# Altium PCB Room03.PcbDoc (part 2 of 2)
Units mil, origin at the board's own origin, x right, y up, seen from the top; angles counter-clockwise.
Board outline 3937.01 x 3543.31 mil, 2 copper layers (Top Layer, Bottom Layer); 93 components, 90 nets, 400 pads, 126 vias.
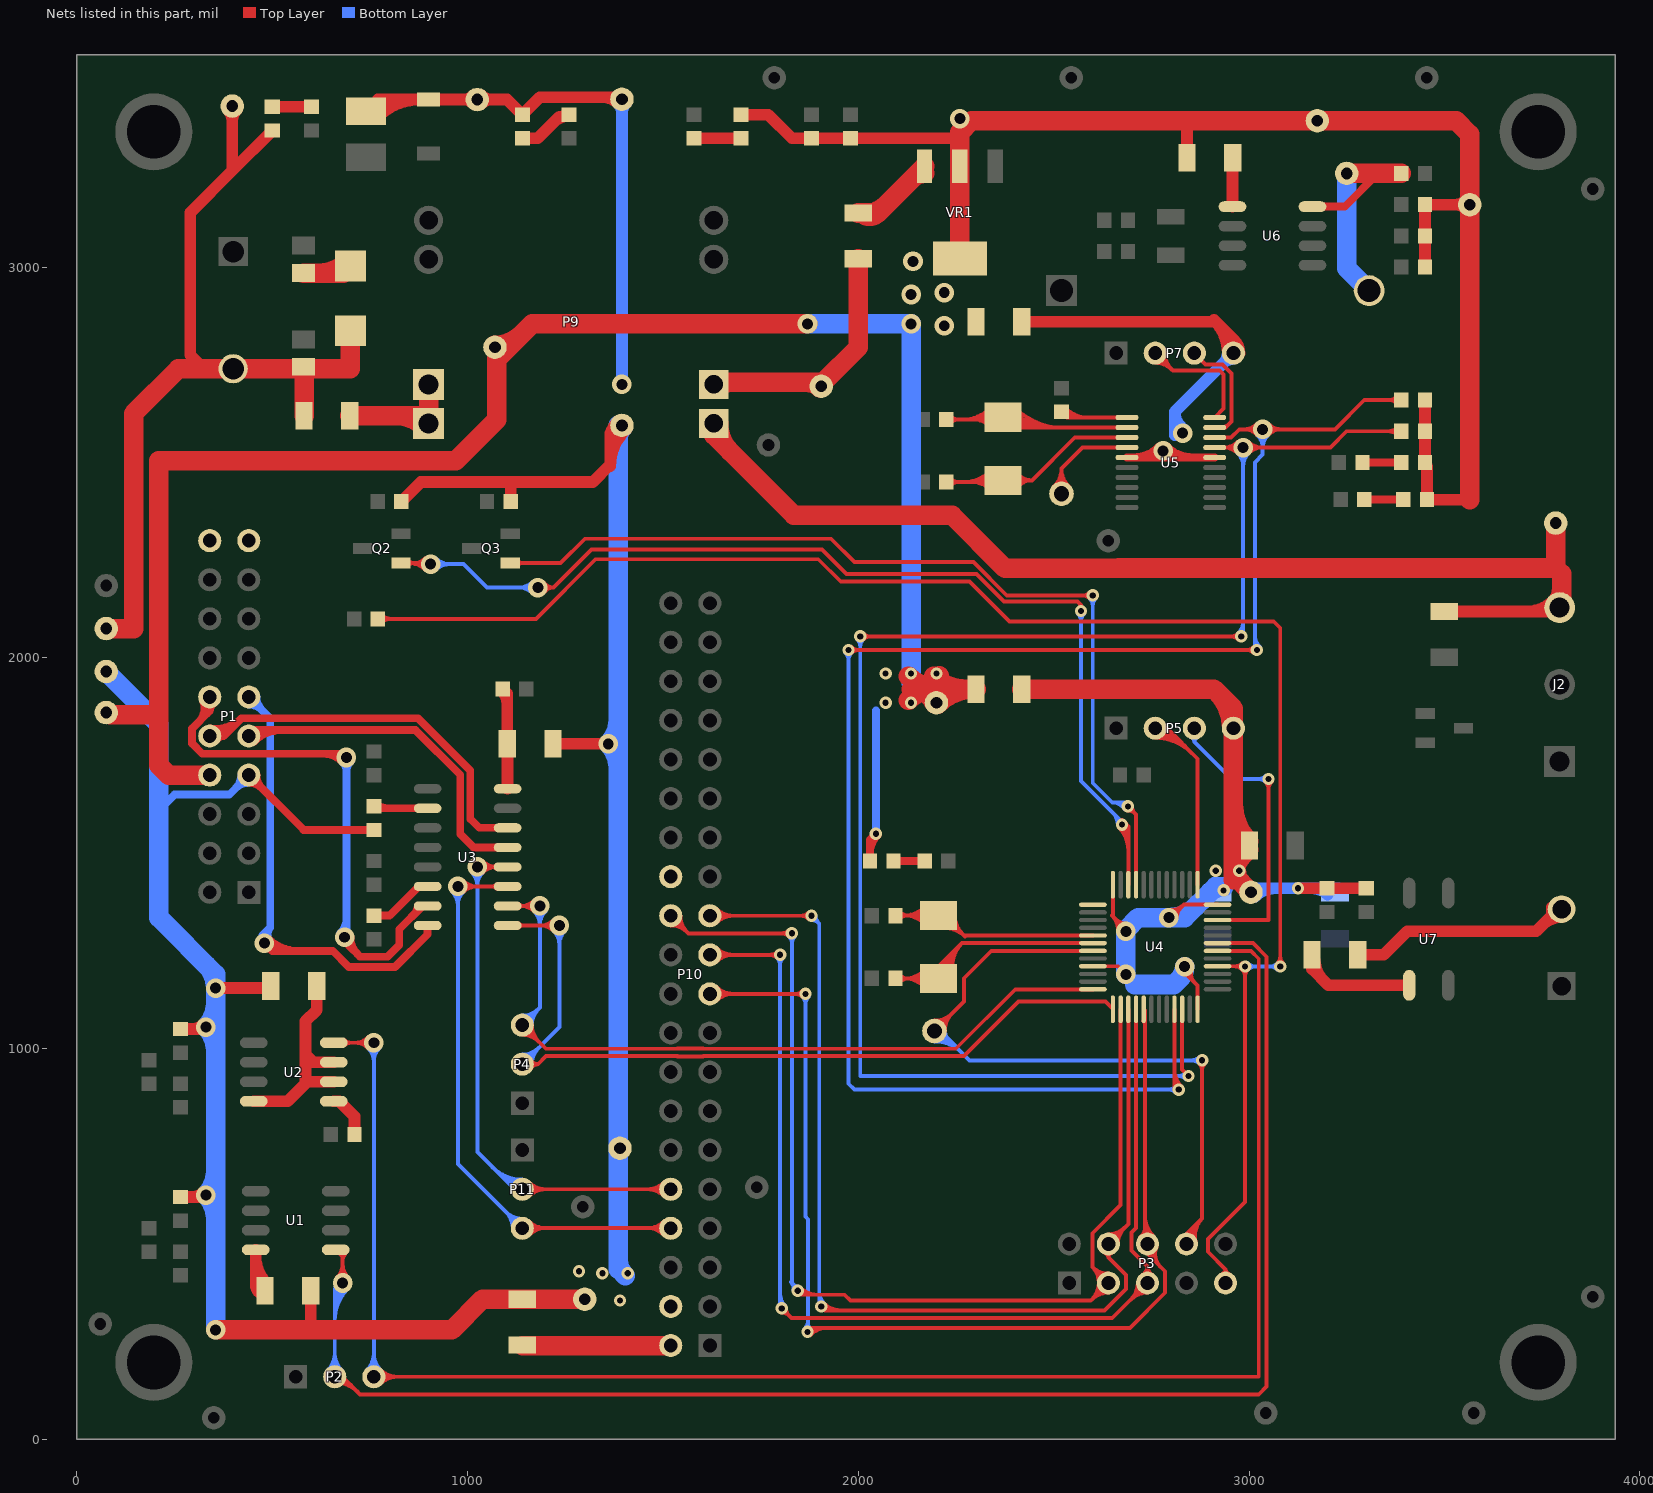
[diagram p2: the nets of this part, all layers, seen from the top]

## Via types
v1: diameter 50, hole 28, Top Layer to Bottom Layer, 76 vias
v2: diameter 31.5, hole 15.75, Top Layer to Bottom Layer, 50 vias

## Nets (pads, with @x,y where several pads share a name; then routed paths per layer and width w, separated by ;. In a path a pad name is that pad's centre, name@x,y a point inside that pad or via, vN(x,y) a via of type N, cw(c..) or ccw(c..) an arc to the next point about the centre after c; other vN are vias at no path point) (continued)
LEDST_103: P3.9 R19.2 U4.28 | length 4626.5
  Top Layer w10: R19.2@770.32,2100 1175,2100 1327.5,2252.5 1897.5,2252.5 1955,2195 2285,2195 2386.75,2093.25 3063.25,2093.25 3080,2076.5 v2(3080,1210) ; R19.2@779.72,2090.59 cw(c802.44,2067.87) 802.44,2100 cw(c802.44,2132.13) R19.2@779.72,2109.41 ; U4.28@2919.45,1210.79 2989.21,1210.79 v2(2990,1210) 2990,607.31 2895,512.31 2895,480 2940,435 ; P3.9@2931.63,423.06 ccw(c2927.29,435) 2940,435 ; P3.9@2940,400 2940,435 ; P3.9@2948.37,423.06 cw(c2952.71,435) 2940,435 ; 2962.15,1210.79 cw(c2962.15,1182.15) 2982.4,1202.4 cw(c2964.05,1184.05) 2990,1184.05 cw(c3015.95,1184.05) v2@2997.6,1202.4 ; 2965.95,1210.79 ccw(c2965.95,1234.05) v2@2982.4,1217.6 ; v2@3072.4,1217.6 ccw(c3054.05,1235.95) 3080,1235.95 ccw(c3105.95,1235.95) v2@3087.6,1217.6
  Bottom Layer w10: v2(2990,1210) v2(3080,1210) ; v2@2997.6,1202.4 cw(c3015.95,1184.05) 3015.95,1210 cw(c3015.95,1235.95) v2@2997.6,1217.6 ; v2@3072.4,1202.4 ccw(c3054.05,1184.05) 3054.05,1210 ccw(c3054.05,1235.95) v2@3072.4,1217.6
NetC1_1: C1.1 U3.2 | length 162.3
  Top Layer w20: C1.1@765.32,1615 U3.2@897.64,1615 ; C1.1@766.86,1626.19 ccw(c793.87,1653.2) 793.87,1615
NetC4_2: C4.2 R10.1 U3.16 | length 281.9
  Top Layer w30: C4.2@1087.35,1916.68 cw(c1053.57,1882.9) 1101.34,1882.9 ; C4.2@1101.34,1908.98 R10.1@1101.34,1780 1102.36,1778.98 U3.16@1102.36,1665
NetC5_2: C5.2 U3.6 | length 200.1
  Top Layer w20: C5.2@760,1340.32 800.32,1340.32 875,1415 U3.6@897.64,1415 ; C5.2@766.86,1334.44 cw(c781.04,1320.26) 781.04,1340.32 cw(c781.04,1360.37) C5.2@766.86,1346.19
NetD1_A: D1.A R11.1 | length 142.4
  Top Layer w20: R11.1@2090.31,1480 D1.A@2169.68,1480 ; R11.1@2096.19,1474.13 cw(c2110.37,1459.94) 2110.37,1480 cw(c2110.37,1500.06) R11.1@2096.19,1485.87 ; D1.A@2163.81,1474.13 ccw(c2149.63,1459.94) 2149.63,1480 ccw(c2149.63,1500.06) D1.A@2163.81,1485.87
NetD2_A: D2.A R17.1 | length 162.4
  Top Layer w20: D2.A@3295.32,2405 R17.1@3394.69,2405 ; D2.A@3301.19,2399.13 cw(c3315.37,2384.94) 3315.37,2405 cw(c3315.37,2425.06) D2.A@3301.19,2410.87 ; R17.1@3388.81,2399.13 ccw(c3374.63,2384.94) 3374.63,2405 ccw(c3374.63,2425.06) R17.1@3388.81,2410.87
NetD3_A: D3.A R18.1 | length 162.4
  Top Layer w20: D3.A@3295.32,2500 R18.1@3394.69,2500 ; D3.A@3296.19,2494.13 cw(c3310.37,2479.94) 3310.37,2500 cw(c3310.37,2520.06) D3.A@3296.19,2505.87 ; R18.1@3383.81,2494.13 ccw(c3369.63,2479.94) 3369.63,2500 ccw(c3369.63,2520.06) R18.1@3383.81,2505.87
NetD5_1: D5.1 R31.2 | length 177
  Top Layer w50: R31.2@580,2984.96 D5.1@682.28,2984.96 ; 622.54,2984.96 ccw(c622.54,3080.14) D5.1@689.84,3012.84
NetD6_A: D6.A R28.1 | length 95
  Top Layer w30: R28.1@500,3410.31 D6.A@595,3410
NetD7_A: D7.A R29.1 | length 195.7
  Top Layer w30: R29.1@1140,3329.69 1179.69,3329.69 1235,3385 ; 1221.45,3371.45 cw(c1259.02,3333.88) D7.A@1259.02,3387.01 ; 1225.65,3375.65 cw(c1253.83,3347.48) D7.A@1258.62,3387.03
NetD8_A: D8.A R30.1 | length 120
  Top Layer w30: D8.A@1580,3329.68 R30.1@1700,3329.69
NetJ1_2: J1.2 R25.1 | length 637.1
  Top Layer w30: R25.1@3278.66,1240 3345,1240 3405,1300 3735,1300 3775,1340 J1.2@3775,1361.85 ; 3751.21,1316.21 cw(c3800,1267.41) J1.2@3800,1336.42 ; 3770.88,1335.88 ccw(c3749.91,1356.85) J1.2@3779.57,1356.85
NetP9_3: P9.3 P9.4 R27.2 | length 362.2
  Top Layer w50: R27.2@698.66,2620 P9.4@880,2620 ; 817.02,2620 cw(c817.02,2517.02) P9.4@889.84,2589.84 ; P9.4@900,2600 P9.3@900,2700
NetR1_2: R1.2 U1.8 | length 212.5
  Top Layer w30: 457.64,395.47 ccw(c483.62,395.47) R1.2@465.25,377.1 ; 457.64,467.9 ccw(c556.05,467.9) R1.2@486.46,398.31 ; U1.8@457.64,485 457.64,403.7 R1.2@481.34,380
NetR2_2: R2.2 U2.2 U2.3 U2.8 | length 558
  Top Layer w30: U2.8@452.64,865 540,865 590,915 U2.2@657.36,915 ; 585,920 585,985 ; R2.2@613.66,1160 613.66,1098.66 585,1070 585,985 ; U2.3@657.36,965 605,965 585,985
NetR8_2: R8.2 U2.1 | length 115.5
  Top Layer w30: U2.1@657.36,865 671.98,865 710.32,826.67 R8.2@710.32,780
NetR16_2: R16.2 U5.1 | length 309.5
  Top Layer w10: R16.2@2516.25,2624.95 ccw(c2539.9,2648.6) 2539.9,2615.16 ; R16.2@2520,2629.68 2534.53,2615.16 U5.1@2687.8,2615.16 ; R16.2@2523.32,2632.02 ccw(c2564.04,2672.74) 2564.04,2615.16 ; R16.2@2530.39,2639.09 ccw(c2588.18,2696.88) 2588.18,2615.16
NetR25_2: R25.2 U7.1 | length 390.6
  Top Layer w20: R25.2@3154.45,1216.69 cw(c3145.58,1203.66) 3161.34,1203.66 ; R25.2@3161.34,1240 3161.34,1203.66 ; R25.2@3168.23,1216.69 ccw(c3177.1,1203.66) 3161.34,1203.66
  Top Layer w30: 3161.34,1203.66 3203.11,1161.89 U7.1@3410,1161.89 ; R25.2@3168.58,1226.81 ccw(c3241.96,1226.81) 3190.07,1174.93
NetR32_2: R32.2 VR1.3 | length 360.5
  Top Layer w50: R32.2@2000,3138.66 2050,3138.66 ; R32.2@2011.47,3136.51 ccw(c2029.53,3159.13) 2050,3138.66 ; R32.2@2013.19,3135.91 ccw(c2013.19,3218.12) 2071.32,3159.99 ; 2138.2,3226.86 cw(c2169.45,3195.61) VR1.3@2169.45,3239.8 ; VR1.3@2169.45,3258.11 2050,3138.66
NEX_CON1: Q3.1 U4.45 | length 2596.4
  Top Layer w10: Q3.1@1109.21,2242.6 1237.6,2242.6 1300,2305 1930,2305 1990,2245 2295,2245 2380,2160 v2(2600,2160) ; Q3.1@1126.25,2236.39 cw(c1141.24,2221.4) 1141.24,2242.6 cw(c1141.24,2263.79) Q3.1@1126.25,2248.81 ; v2@2592.4,2152.4 ccw(c2574.05,2134.05) 2574.05,2160 ccw(c2574.05,2185.95) v2@2592.4,2167.6 ; v2@2690,1609.25 cw(c2690,1583.3) 2708.35,1601.65 cw(c2726.7,1620) v2@2700.75,1620 ; v2(2690,1620) 2710.79,1599.21 U4.45@2710.79,1419.45
  Bottom Layer w10: v2@2592.4,2152.4 cw(c2574.05,2134.05) 2600,2134.05 cw(c2625.95,2134.05) v2@2607.6,2152.4 ; v2(2600,2160) 2600,1680 2650,1630 ; 2669.28,1630 cw(c2669.28,1605.4) v2@2689.39,1619.57 ; v2@2681.21,1613.81 ccw(c2650,1591.82) 2650,1630 ; v2(2690,1620) 2680,1630 2650,1630
NEX_CON2: Q2.1 U4.46 | length 3228.7
  Top Layer w10: Q2.1@829.21,2242.6 902.6,2242.6 v1(905.2,2240) ; Q2.1@846.25,2236.39 cw(c861.24,2221.4) 861.24,2242.6 cw(c861.24,2263.79) Q2.1@846.25,2248.81 ; Q2.1@850.64,2242.6 cw(c850.64,2185.44) v1@891.05,2225.86 ; 863.19,2242.6 ccw(c863.19,2282.01) v1@891.05,2254.14 ; 874.78,2242.6 cw(c874.78,2209.58) v1@898.13,2232.93 ; v1(1180,2180) 1220,2180 ; v1@1196,2168 cw(c1220,2150) 1220,2180 ; v1@1196,2192 ccw(c1220,2210) 1220,2180 ; 2564.74,2140.26 cw(c2551.11,2126.63) v2@2569.29,2120.25 ; v2(2570,2120) 2568,2120 2564,2124 2570,2130 2570,2135 2561,2144 2373.37,2144 2302.37,2215 1970,2215 1907.5,2277.5 1317.5,2277.5 1220,2180 ; v2@2667.19,1565.65 cw(c2609.45,1507.92) 2691.1,1507.92 ; v2@2674.26,1572.72 cw(c2633.59,1532.06) 2691.1,1532.06 ; v2(2674.79,1573.25) 2675,1573.46 2675,1585 2691.1,1568.9 U4.46@2691.1,1419.45 ; v2@2681.33,1579.79 cw(c2657.74,1556.2) 2691.1,1556.2
  Bottom Layer w10: v1(905.2,2240) 990,2240 1050,2180 v1(1180,2180) ; v1@919.34,2225.86 cw(c953.48,2191.72) 953.48,2240 cw(c953.48,2288.28) v1@919.34,2254.14 ; v1@1165.86,2165.86 ccw(c1131.72,2131.72) 1131.72,2180 ccw(c1131.72,2228.28) v1@1165.86,2194.14 ; v2@2562.4,2112.4 cw(c2544.05,2094.05) 2570,2094.05 cw(c2595.95,2094.05) v2@2577.6,2112.4 ; v2(2570,2120) 2570,1685 v2@2675,1580 ; 2651.52,1603.48 cw(c2621.29,1573.25) v2@2664.04,1573.25
NRST: P3.8 T1.1 U4.7 | length 2333.3
  Top Layer w10: T1.1@2195,1045 2270,1120 2270,1180 2340.16,1250.16 U4.7@2600.55,1250.16 ; T1.1@2195,1061.5 ccw(c2195,1101.32) 2223.16,1073.16 ccw(c2251.32,1045) T1.1@2211.5,1045 ; T1.1@2195,1071.5 ccw(c2195,1135.46) 2240.23,1090.23 ccw(c2285.46,1045) T1.1@2221.5,1045 ; P3.8@2840,500 2840,525 2880,565 ; P3.8@2844.39,501.11 cw(c2884.06,511.18) 2855.12,540.12 ; P3.8@2854.08,503.57 cw(c2903.91,516.21) 2867.56,552.56 ; P3.8@2863.77,506.03 cw(c2923.75,521.25) 2880,565 ; v2@2872.4,962.4 cw(c2854.05,944.05) 2880,944.05 cw(c2905.95,944.05) v2@2887.6,962.4 ; v2(2880,970) 2880,565
  Bottom Layer w10: T1.1@2195,1018.5 cw(c2195,918.32) 2265.84,989.16 ; T1.1@2195,1028.5 cw(c2195,952.47) 2248.77,1006.23 ; T1.1@2195,1038.5 cw(c2195,986.61) 2231.7,1023.3 ; T1.1@2195,1045 2210,1045 2285,970 v2(2880,970) ; T1.1@2221.5,1045 ccw(c2249.25,1045) 2229.62,1025.38 ; v2@2872.4,962.4 ccw(c2854.05,944.05) 2854.05,970 ccw(c2854.05,995.95) v2@2872.4,977.6
NRST_030: T2.1 U5.4 | length 417.9
  Top Layer w10: T2.1@2501.26,2438.74 ccw(c2456.03,2483.97) 2520,2483.97 ccw(c2583.97,2483.97) T2.1@2538.74,2438.74 ; T2.1@2508.34,2431.66 ccw(c2480.18,2459.82) 2520,2459.82 ccw(c2559.82,2459.82) T2.1@2531.66,2431.66 ; T2.1@2520,2420 2520,2485 2573.39,2538.39 U5.4@2687.8,2538.39
OSC32_IN: C6.2 U4.5 Y1.1 | length 977.5
  Top Layer w10: C6.2@2096.02,1340.71 Y1.1@2205,1340.71 2219.29,1340.71 2270.47,1289.53 U4.5@2600.55,1289.53 ; C6.2@2104.72,1331.57 cw(c2126.78,1309.52) 2126.78,1340.71 ; C6.2@2104.72,1350.39 ccw(c2128.11,1373.78) 2128.11,1340.71 ; Y1.1@2172.25,1317.8 ccw(c2116.93,1262.48) 2116.93,1340.71 ccw(c2116.93,1418.93) Y1.1@2172.25,1363.62 ; Y1.1@2179.32,1324.87 ccw(c2141.08,1286.63) 2141.08,1340.71 ccw(c2141.08,1394.79) Y1.1@2179.32,1356.55 ; Y1.1@2216.26,1318.35 cw(c2219.62,1265.53) 2257.04,1302.96 ; Y1.1@2216.9,1308.37 cw(c2221.48,1236.1) 2272.69,1287.31 ; Y1.1@2237.24,1340.71 ccw(c2280.59,1340.71) Y1.1@2249.94,1310.06 ; Y1.1@2247.24,1340.71 ccw(c2314.73,1340.71) 2267.01,1292.99
OSC32_OUT: C7.2 U4.6 Y1.2 | length 1162.8
  Top Layer w10: C7.2@2096.02,1179.29 Y1.2@2205,1179.29 2205,1210 2264.84,1269.84 ; C7.2@2104.72,1169.61 cw(c2128.11,1146.22) 2128.11,1179.29 ; C7.2@2104.72,1188.43 ccw(c2126.78,1210.48) 2126.78,1179.29 ; Y1.2@2172.25,1156.38 ccw(c2116.93,1101.07) 2116.93,1179.29 ccw(c2116.93,1257.52) Y1.2@2172.25,1202.2 ; Y1.2@2179.32,1163.45 ccw(c2141.08,1125.21) 2141.08,1179.29 ccw(c2141.08,1233.37) Y1.2@2179.32,1195.13 ; Y1.2@2207.62,1176.92 cw(c2251.37,1191.26) 2218.82,1223.82 ; Y1.2@2217.12,1180.04 cw(c2268.7,1196.94) 2230.32,1235.32 ; Y1.2@2226.63,1183.15 cw(c2286.03,1202.62) 2241.83,1246.83 ; Y1.2@2236.13,1186.27 cw(c2303.36,1208.3) 2253.33,1258.33 ; Y1.2@2245.63,1189.38 cw(c2320.69,1213.98) 2264.84,1269.84 ; U4.6@2600.55,1269.84 2264.84,1269.84
OSC_IN: C10.2 U5.2 Y2.1 | length 1232.8
  Top Layer w10: C10.2@2225.32,2610 Y2.1@2364.29,2610 ; C10.2@2234.72,2600.59 cw(c2257.44,2577.87) 2257.44,2610 cw(c2257.44,2642.13) C10.2@2234.72,2619.41 ; 2268.15,2610 ccw(c2268.15,2707.71) Y2.1@2337.25,2638.62 ; 2292.29,2610 ccw(c2292.29,2683.57) Y2.1@2344.32,2631.55 ; 2295.72,2610 cw(c2295.72,2551.27) Y2.1@2337.25,2592.8 ; 2316.44,2610 ccw(c2316.44,2659.43) Y2.1@2351.39,2624.48 ; 2319.86,2610 cw(c2319.86,2575.41) Y2.1@2344.32,2599.87 ; Y2.1@2370,2615.71 2396.14,2589.57 U5.2@2687.8,2589.57 ; Y2.1@2374.47,2610.34 ccw(c2424.61,2660.48) 2424.61,2589.57 ; Y2.1@2381.54,2617.41 ccw(c2448.75,2684.62) 2448.75,2589.57 ; Y2.1@2388.61,2624.48 ccw(c2472.89,2708.76) 2472.89,2589.57 ; Y2.1@2395.68,2631.55 ccw(c2497.04,2732.9) 2497.04,2589.57 ; Y2.1@2402.75,2638.62 ccw(c2521.18,2757.05) 2521.18,2589.57
OSC_OUT: C11.2 U5.3 Y2.2 | length 947.9
  Top Layer w10: C11.2@2225.32,2450 Y2.2@2365.71,2450 ; C11.2@2234.72,2440.59 cw(c2257.44,2417.87) 2257.44,2450 cw(c2257.44,2482.13) C11.2@2234.72,2459.41 ; 2271.57,2450 ccw(c2271.57,2542.88) Y2.2@2337.25,2477.2 ; 2292.29,2450 cw(c2292.29,2386.43) Y2.2@2337.25,2431.38 ; 2295.72,2450 ccw(c2295.72,2518.73) Y2.2@2344.32,2470.13 ; 2316.44,2450 cw(c2316.44,2410.57) Y2.2@2344.32,2438.45 ; 2319.86,2450 ccw(c2319.86,2494.59) Y2.2@2351.39,2463.06 ; Y2.2@2370,2454.29 2444.29,2454.29 ; Y2.2@2397.82,2440.93 cw(c2424.4,2421.18) 2424.4,2454.29 cw(c2424.4,2487.4) Y2.2@2397.82,2467.65 ; Y2.2@2405.85,2434.97 cw(c2444.29,2406.4) 2444.29,2454.29 ; Y2.2@2405.85,2473.62 ccw(c2444.29,2502.18) 2444.29,2454.29 ; U5.3@2687.8,2563.98 2553.98,2563.98 2444.29,2454.29
RASPI_RX: P1.9 U3.13 | length 998.3
  Top Layer w20: P1.9@439.67,1800.33 cw(c475.07,1764.93) 475.07,1815 ; P1.9@440,1800 455,1815 866.77,1815 981,1700.77 981,1549 1015,1515 U3.13@1102.36,1515 ; P1.9@453.81,1786.19 cw(c523.36,1716.64) 523.36,1815
RASPI_TX: P1.10 U3.14 | length 1158.8
  Top Layer w20: P1.10@339.93,1799.53 ccw(c348.68,1861.32) 392.81,1817.19 ; P1.10@340,1800 375.61,1800 ; P1.10@342.74,1819.33 ccw(c355.71,1910.96) 421.14,1845.52 ; P1.10@356.46,1789.5 cw(c375.61,1777.29) 375.61,1800 ; P1.10@356.46,1810.5 ccw(c375.61,1822.71) 375.61,1800 ; U3.14@1102.36,1565 1030,1565 1007,1588 1007,1711.54 873.01,1845.53 421.14,1845.53 375.61,1800
RU0RX: P10.10 P11.2 U3.12 | length 2016.8
  Top Layer w10: v1(1025,1465) U3.12@1102.36,1465 ; v1@1039.14,1450.86 cw(c1073.28,1416.72) 1073.28,1465 cw(c1073.28,1513.28) v1@1039.14,1479.14 ; U3.12@1073.92,1460.18 ccw(c1062.3,1448.56) 1062.3,1465 ccw(c1062.3,1481.44) U3.12@1073.92,1469.82 ; P11.2@1140,640 P10.10@1520,640 ; P11.2@1150.27,629.73 cw(c1175.07,604.93) 1175.07,640 cw(c1175.07,675.07) P11.2@1150.27,650.27 ; P11.2@1157.34,622.66 cw(c1199.21,580.79) 1199.21,640 cw(c1199.21,699.21) P11.2@1157.34,657.34 ; P10.10@1502.66,622.66 ccw(c1460.79,580.79) 1460.79,640 ccw(c1460.79,699.21) P10.10@1502.66,657.34 ; P10.10@1509.73,629.73 ccw(c1484.93,604.93) 1484.93,640 ccw(c1484.93,675.07) P10.10@1509.73,650.27
  Bottom Layer w10: v1@1010.86,1450.86 cw(c976.72,1416.72) 1025,1416.72 cw(c1073.28,1416.72) v1@1039.14,1450.86 ; 1025,775 v1(1025,1465) ; 1025,780 1025,735 1120,640 P11.2@1140,640 ; 1063.99,696.01 ccw(c1140,772.03) P11.2@1140,664.53 ; 1081.06,678.94 ccw(c1140,737.88) P11.2@1140,654.53 ; 1098.13,661.87 ccw(c1140,703.74) P11.2@1140,644.53
RU0TX: P10.8 P11.3 U3.11 | length 2068.4
  Top Layer w10: v1@985,1415 U3.11@1102.36,1415 ; v1@989.14,1400.86 cw(c1023.28,1366.72) 1023.28,1415 cw(c1023.28,1463.28) v1@989.14,1429.14 ; U3.11@1073.92,1410.18 ccw(c1062.3,1398.56) 1062.3,1415 ccw(c1062.3,1431.44) U3.11@1073.92,1419.82 ; P11.3@1140,540 1141,541 1519,541 P10.8@1520,540 ; P11.3@1150.27,529.73 cw(c1177.49,502.51) 1177.49,541 ; P11.3@1150.27,550.27 ccw(c1172.66,572.66) 1172.66,541 ; P11.3@1157.34,522.66 cw(c1201.63,478.37) 1201.63,541 ; P11.3@1157.34,557.34 ccw(c1196.8,596.8) 1196.8,541 ; 1458.37,541 cw(c1458.37,478.37) P10.8@1502.66,522.66 ; 1463.2,541 ccw(c1463.2,596.8) P10.8@1502.66,557.34 ; 1482.51,541 cw(c1482.51,502.51) P10.8@1509.73,529.73 ; 1487.34,541 ccw(c1487.34,572.66) P10.8@1509.73,550.27
  Bottom Layer w10: v1@960.86,1400.86 cw(c926.72,1366.72) 975,1366.72 cw(c1023.28,1366.72) v1@989.14,1400.86 ; v1(975,1415) 975,705 P11.3@1140,540 P11.3@1145,540 ; P11.3@1115.47,540 ccw(c1056.26,540) 1098.13,581.87 ccw(c1140,623.74) P11.3@1140,564.53 ; P11.3@1125.47,540 ccw(c1090.4,540) 1115.2,564.8 ccw(c1140,589.6) P11.3@1140,554.53
SPI1_MISO: P3.5 P10.21 U4.16 | length 3301.7
  Top Layer w10: P10.21@1620,1240 v2(1800,1240) ; P10.21@1630.27,1229.73 cw(c1655.07,1204.93) 1655.07,1240 cw(c1655.07,1275.07) P10.21@1630.27,1250.27 ; P10.21@1637.34,1222.66 cw(c1679.21,1180.79) 1679.21,1240 cw(c1679.21,1299.21) P10.21@1637.34,1257.34 ; v2@1792.4,1232.4 ccw(c1774.05,1214.05) 1774.05,1240 ccw(c1774.05,1265.95) v2@1792.4,1247.6 ; v2@1804.09,324.25 cw(c1804.09,298.3) 1822.44,316.65 cw(c1840.78,335) v2@1814.84,335 ; v2(1804.09,335) 1829.09,310 2650,310 P3.5@2740,400 2740,442.69 ; U4.16@2710.79,1100.55 2710.79,540.79 2699.47,529.47 2699.47,483.21 2740,442.69 ; P3.5@2715.47,400 cw(c2656.26,400) 2698.13,358.13 cw(c2740,316.26) P3.5@2740,375.47 ; P3.5@2725.47,400 cw(c2690.4,400) 2715.2,375.2 cw(c2740,350.4) P3.5@2740,385.47 ; P3.5@2727.65,421.19 ccw(c2715.12,442.68) 2740,442.68 ; P3.5@2752.35,421.19 cw(c2764.88,442.68) 2740,442.68
  Bottom Layer w10: v2@1792.4,1232.4 cw(c1774.05,1214.05) 1800,1214.05 cw(c1825.95,1214.05) v2@1807.6,1232.4 ; v2@1796.49,342.6 ccw(c1788.01,351.08) 1800,351.08 ; v2@1800,335 v2(1800,1240) ; 1800,370.82 ccw(c1839.91,370.82) v2@1811.69,342.6
SPI1_MOSI: P3.6 P10.19 U4.17 | length 3415.8
  Top Layer w10: P10.19@1620,1140 v2@1855,1140 ; P10.19@1630.27,1129.73 cw(c1655.07,1104.93) 1655.07,1140 cw(c1655.07,1175.07) P10.19@1630.27,1150.27 ; P10.19@1637.34,1122.66 cw(c1679.21,1080.79) 1679.21,1140 cw(c1679.21,1199.21) P10.19@1637.34,1157.34 ; v2@1857.4,1132.4 ccw(c1839.05,1114.05) 1839.05,1140 ccw(c1839.05,1165.95) v2@1857.4,1147.6 ; v2@1870,285 2695,285 2785,375 2785,430 2740,475 P3.6@2740,500 2733.65,506.35 U4.17@2733.65,1097.38 ; v2@1870.53,274.47 cw(c1895.95,249.05) 1895.95,285 ; v2@1877.6,267.4 cw(c1920.09,224.91) 1920.09,285 ; P3.6@2722.66,517.34 ccw(c2696.13,543.87) 2733.65,543.87 ; U4.17@2730.11,1070.27 cw(c2721.58,1061.73) 2733.65,1061.73 ; 2733.65,550.41 ccw(c2790.41,550.41) P3.6@2750.27,510.27 ; 2733.65,574.56 ccw(c2814.56,574.56) P3.6@2757.34,517.34 ; P3.6@2744.19,498.3 ccw(c2773.67,486.32) 2751.17,463.83 ; P3.6@2753.46,494.53 ccw(c2788.84,480.16) 2761.84,453.16 ; P3.6@2762.72,490.77 ccw(c2804,474) 2772.5,442.5
  Bottom Layer w10: v2@1857.4,1132.4 cw(c1839.05,1114.05) 1865,1114.05 cw(c1890.95,1114.05) v2@1872.6,1132.4 ; v2@1862.4,282.6 ccw(c1839.83,305.17) 1871.75,305.17 ; v2(1865,1140) 1865,570 1871.75,563.25 v2@1871.75,285 ; 1871.75,296.73 ccw(c1891.73,296.73) v2@1877.6,282.6
  other v2: 1870,275
SPI1_NSS: P3.3 P10.24 U4.14 | length 3494.1
  Top Layer w10: P10.24@1520,1315.47 cw(c1520,1256.26) 1561.87,1298.13 cw(c1603.74,1340) P10.24@1544.53,1340 ; P10.24@1520,1325.47 cw(c1520,1290.4) 1544.8,1315.2 cw(c1569.6,1340) P10.24@1534.53,1340 ; P10.24@1520,1340 1565,1295 v2(1830,1295) v2@1835,1295 ; v2@1822.4,1287.4 ccw(c1804.05,1269.05) 1804.05,1295 ccw(c1804.05,1320.95) v2@1822.4,1302.6 ; v2(1845,380) 1850,380 1855,375 1855,370 1965,370 1980,355 2595,355 P3.3@2640,400 2599.47,440.53 ; v2@1845.53,380.53 ccw(c1870.95,405.95) 1870.95,370 ; v2@1852.6,387.6 ccw(c1895.09,430.09) 1895.09,370 ; P3.3@2615.47,400 cw(c2556.26,400) 2598.13,358.13 cw(c2640,316.26) P3.3@2640,375.47 ; P3.3@2615.48,400.57 ccw(c2560.8,401.85) 2599.47,440.53 ; P3.3@2625.47,400 cw(c2590.4,400) 2615.2,375.2 cw(c2640,350.4) P3.3@2640,385.47 ; P3.3@2625.48,400.34 ccw(c2593.09,401.1) 2616,424 ccw(c2638.9,446.91) P3.3@2639.66,414.52 ; P3.3@2639.43,424.52 cw(c2638.15,479.2) 2599.47,440.53 ; U4.14@2671.42,1100.55 2671.42,599.26 2599.47,527.31 2599.47,440.53
  Bottom Layer w10: v2@1822.4,1287.4 cw(c1804.05,1269.05) 1830,1269.05 cw(c1855.95,1269.05) v2@1837.6,1287.4 ; 1827.5,402.5 cw(c1810.25,385.25) v2@1834.37,381.61 ; v2(1830,1295) 1830,400 1855,375 1835,395 ; 1835.19,394.81 ccw(c1845,404.62) v2@1845,390.75
SPI1_SCK: P3.4 P10.23 U4.15 | length 3353.6
  Top Layer w10: P10.23@1620,1340 v2(1880,1340) ; P10.23@1630.27,1329.73 cw(c1655.07,1304.93) 1655.07,1340 cw(c1655.07,1375.07) P10.23@1630.27,1350.27 ; P10.23@1637.34,1322.66 cw(c1679.21,1280.79) 1679.21,1340 cw(c1679.21,1399.21) P10.23@1637.34,1357.34 ; v2@1872.4,1332.4 ccw(c1854.05,1314.05) 1854.05,1340 ccw(c1854.05,1365.95) v2@1872.4,1347.6 ; v2(1905,340) 1915,330 2630,330 2685,385 2685,420 2640,465 ; v2@1905.53,340.53 ccw(c1930.95,365.95) 1930.95,330 ; v2@1912.6,347.6 ccw(c1955.09,390.09) 1955.09,330 ; P3.4@2631.63,476.94 cw(c2627.29,465) 2640,465 ; P3.4@2640,514.53 ccw(c2640,549.6) 2664.8,524.8 ccw(c2689.6,500) P3.4@2654.53,500 ; P3.4@2640,524.53 ccw(c2640,583.74) 2681.87,541.87 ccw(c2723.74,500) P3.4@2664.53,500 ; P3.4@2648.37,476.94 ccw(c2652.71,465) 2640,465 ; U4.15@2691.1,1100.55 2691.1,551.1 P3.4@2640,500 2640,465
  Bottom Layer w10: v2@1880,1329.25 cw(c1880,1303.3) 1898.35,1321.65 cw(c1916.7,1340) v2@1890.75,1340 ; v2(1880,1340) 1900,1320 v2@1900,335 ; 1900,378.02 ccw(c1943.02,378.02) v2@1912.6,347.6
SPI2_NSS: P10.26
ST407_RX: P1.11 U3.8 | length 1400.5
  Top Layer w20: v1@476.46,1266.46 ccw(c516.21,1306.21) 516.21,1250 ; v1(480,1270) 500,1250 655,1250 696,1209 814,1209 897.64,1292.64 U3.8@897.64,1315 ; v1@490.61,1280.61 ccw(c564.5,1354.5) 564.5,1250
  Bottom Layer w20: P1.11@440,1880.47 cw(c440,1833.33) 473.34,1866.66 cw(c506.67,1900) P1.11@459.53,1900 ; P1.11@440,1900 495,1845 495,1310 ; v1(480,1270) 475,1270 475,1290 495,1310 ; v1@492.28,1278.62 cw(c512.31,1292.69) 495,1310
ST407_TX: P1.12 U3.7 | length 1680.5
  Top Layer w20: 312.28,1836.67 ccw(c277.5,1871.45) P1.12@322.24,1891.88 ; P1.12@329.5,1883.54 cw(c317.29,1864.39) 340,1864.39 ; 332.65,1857.03 ccw(c305.46,1884.22) P1.12@340.43,1900.2 ; P1.12@340,1900 340,1864.39 ; P1.12@350.5,1883.54 ccw(c362.71,1864.39) 340,1864.39 ; 630.92,1754.47 cw(c630.92,1685.92) v1@679.39,1734.39 ; v1@695,1265 725,1235 795,1235 825,1265 825,1305.31 884.69,1365 U3.7@897.64,1365 ; v1@695,1735 675.53,1754.47 321.14,1754.47 294.47,1781.14 294.47,1818.86 340,1864.39 ; v1@700,1285 ccw(c760.36,1285) 717.68,1242.32 ; 863.38,1343.69 ccw(c842.07,1365) U3.7@872.2,1365
  Bottom Layer w20: v1@674.39,1295.61 ccw(c636.72,1333.28) 690,1333.28 ; v1@679.39,1734.39 cw(c653.79,1708.79) 690,1708.79 cw(c726.21,1708.79) v1@700.61,1734.39 ; v1@690,1290 v1(690,1745)
  other v1: 685,1285
SWCLK_030: P7.2 U5.20 | length 465.2
  Top Layer w10: P7.2@2760,2755.47 cw(c2760,2696.26) 2801.87,2738.13 cw(c2843.74,2780) P7.2@2784.53,2780 ; P7.2@2760,2765.47 cw(c2760,2730.4) 2784.8,2755.2 cw(c2809.6,2780) P7.2@2774.53,2780 ; P7.2@2760,2780 2805,2735 2925.06,2735 2935,2725.06 2935,2637.95 U5.20@2912.2,2615.16
SWCLK_103: P5.2 U4.37 | length 762.8
  Top Layer w10: P5.2@2760,1795.47 cw(c2760,1663.83) 2853.08,1756.92 ; P5.2@2760,1805.47 cw(c2760,1697.97) 2836.01,1773.99 ; P5.2@2760,1815.47 cw(c2760,1732.12) 2818.94,1791.06 ; P5.2@2760,1820 2790,1820 2868.27,1741.73 U4.37@2868.27,1419.45 ; P5.2@2760,1825.47 cw(c2760,1766.26) 2801.87,1808.13
SWDIO_030: P7.3 U5.19 | length 301.1
  Top Layer w10: P7.3@2860,2780 2889,2751 2931.69,2751 2955,2727.69 2955,2605 2939.57,2589.57 U5.19@2912.2,2589.57 ; U5.19@2934.84,2591.46 ccw(c2934.84,2607.42) 2946.13,2596.13
SWDIO_103: P5.3 U4.34 | length 868.6
  Top Layer w10: U4.34@2919.45,1328.9 3050,1328.9 v2(3050,1690) ; v2@3042.4,1682.4 cw(c3024.05,1664.05) 3050,1664.05 cw(c3075.95,1664.05) v2@3057.6,1682.4
  Bottom Layer w10: P5.3@2851.63,1796.94 cw(c2847.29,1785) 2860,1785 ; P5.3@2860,1820 2860,1785 ; P5.3@2868.37,1796.94 ccw(c2872.71,1785) 2860,1785 ; v2@3042.4,1682.4 ccw(c3024.05,1664.05) 3024.05,1690 ccw(c3024.05,1715.95) v2@3042.4,1697.6 ; v2(3050,1690) 2955,1690 2860,1785
U1RX: P2.2 U1.1 U4.31 | length 4619.3
  Top Layer w10: P2.2@660,160 680,160 725,115 3025,115 3045,135 3045,1235 3010.16,1269.84 U4.31@2919.45,1269.84 ; P2.2@660.05,155.47 cw(c660.68,97.92) 701.38,138.62 ; P2.2@660.16,145.47 cw(c661.05,64.67) 718.19,121.81 ; U1.1@662.36,485 680,467.36 v1(680,400) ; v1@665.86,414.14 ccw(c631.72,448.28) 680,448.28 ccw(c728.28,448.28) v1@694.14,414.14 ; 680,454.11 cw(c714.91,454.11) U1.1@690.22,478.79 ; 680,466.91 cw(c690.4,466.91) U1.1@686.94,476.72
  Bottom Layer w10: P2.2@642.66,177.34 ccw(c600.79,219.21) 660,219.21 ccw(c719.21,219.21) P2.2@677.34,177.34 ; P2.2@649.73,170.27 ccw(c624.93,195.07) 660,195.07 ccw(c695.07,195.07) P2.2@670.27,170.27 ; P2.2@660,160 660,380 v1(680,400) ccw(c728.28,351.72) 660,351.72 ; 660,303.43 cw(c776.57,303.43) v1@694.14,385.86 ; 660,327.57 cw(c752.43,327.57) v1@687.07,392.93 ; 660,375.86 cw(c704.14,375.86) v1@672.93,407.07
U1TX: P2.3 U2.4 U4.30 | length 4887.7
  Top Layer w10: U2.4@657.36,1015 v1(760,1015) ; U2.4@685.22,1008.79 cw(c700.21,993.8) 700.21,1015 cw(c700.21,1036.2) U2.4@685.22,1021.21 ; v1@745.86,1000.86 ccw(c711.72,966.72) 711.72,1015 ccw(c711.72,1063.28) v1@745.86,1029.14 ; P2.3@760,160 3025,160 3025,1230 3004.84,1250.16 U4.30@2919.45,1250.16 ; P2.3@770.27,149.73 cw(c795.07,124.93) 795.07,160 cw(c795.07,195.07) P2.3@770.27,170.27 ; P2.3@777.34,142.66 cw(c819.21,100.79) 819.21,160 cw(c819.21,219.21) P2.3@777.34,177.34
  Bottom Layer w10: P2.3@742.66,177.34 ccw(c700.79,219.21) 760,219.21 ccw(c819.21,219.21) P2.3@777.34,177.34 ; v1@745.86,1000.86 cw(c711.72,966.72) 760,966.72 cw(c808.28,966.72) v1@774.14,1000.86 ; P2.3@749.73,170.27 ccw(c724.93,195.07) 760,195.07 ccw(c795.07,195.07) P2.3@770.27,170.27 ; P2.3@760,160 v1(760,1015)
U2RX: P4.2 U3.9 U4.13 | length 2498.9
  Top Layer w10: U3.9@1102.36,1315 v1(1235,1315) ; U3.9@1130.8,1310.18 cw(c1142.43,1298.56) 1142.43,1315 cw(c1142.43,1331.44) U3.9@1130.8,1319.82 ; P4.2@1140,960 1180,960 ; P4.2@1161.86,948.88 cw(c1180,939.65) 1180,960 ; P4.2@1161.86,971.12 ccw(c1180,980.35) 1180,960 ; v1@1220.86,1300.86 ccw(c1186.72,1266.72) 1186.72,1315 ccw(c1186.72,1363.28) v1@1220.86,1329.14 ; U4.13@2651.73,1100.55 2632.28,1120 2410,1120 2270.53,980.53 1603.21,980.53 1602.69,980 1537.31,980 1536.79,980.53 1200.53,980.53 1180,960
  Bottom Layer w10: P4.2@1140,960 1235,1055 v1(1235,1315) ; P4.2@1140,974.53 ccw(c1140,1009.6) 1164.8,984.8 ccw(c1189.6,960) P4.2@1154.53,960 ; P4.2@1140,984.53 ccw(c1140,1043.74) 1181.87,1001.87 ccw(c1223.74,960) P4.2@1164.53,960 ; v1@1220.86,1300.86 cw(c1186.72,1266.72) 1235,1266.72 cw(c1283.28,1266.72) v1@1249.14,1300.86
  Bottom Layer w20: P4.2@1140,960 P4.2@1145,960 ; v1@1225,1315 v1(1235,1315)
U2TX: P4.3 U3.10 U4.12 | length 2429.1
  Top Layer w10: U3.10@1102.36,1365 v1(1185,1365) ; U3.10@1130.8,1360.18 cw(c1142.43,1348.56) 1142.43,1365 cw(c1142.43,1381.44) U3.10@1130.8,1369.82 ; P4.3@1140,1035.47 cw(c1140,976.26) 1181.87,1018.13 cw(c1223.74,1060) P4.3@1164.53,1060 ; P4.3@1140,1045.47 cw(c1140,1010.4) 1164.8,1035.2 cw(c1189.6,1060) P4.3@1154.53,1060 ; P4.3@1140,1060 1200.53,999.47 1536.79,999.47 1537.31,1000 1602.69,1000 1603.21,999.47 2249.47,999.47 2401.73,1151.73 U4.12@2600.55,1151.73 ; v1@1170.86,1350.86 ccw(c1136.72,1316.72) 1136.72,1365 ccw(c1136.72,1413.28) v1@1170.86,1379.14
  Bottom Layer w10: P4.3@1140,1060 1185,1105 v1(1185,1365) ; P4.3@1140,1074.53 ccw(c1140,1109.6) 1164.8,1084.8 ccw(c1189.6,1060) P4.3@1154.53,1060 ; P4.3@1140,1084.53 ccw(c1140,1143.74) 1181.87,1101.87 ccw(c1223.74,1060) P4.3@1164.53,1060 ; v1@1170.86,1350.86 cw(c1136.72,1316.72) 1185,1316.72 cw(c1233.28,1316.72) v1@1199.14,1350.86
U3RX: R12.1 U4.22 U5.17 | length 4582.2
  Top Layer w10: v2(2005,2055) v2(2980,2055) ; v2@2012.6,2047.4 cw(c2030.95,2029.05) 2030.95,2055 cw(c2030.95,2080.95) v2@2012.6,2062.6 ; U4.22@2828.9,1100.55 2828.9,946.1 v2(2845,930) ; U5.17@2912.2,2538.39 v1(2985,2538.39) 3208.39,2538.39 3250,2580 R12.1@3389.69,2580 ; v1@2970.86,2524.24 ccw(c2936.72,2490.1) 2936.72,2538.39 ccw(c2936.72,2586.67) v1@2970.86,2552.53 ; v2@2972.4,2047.4 ccw(c2954.05,2029.05) 2954.05,2055 ccw(c2954.05,2080.95) v2@2972.4,2062.6 ; v1@2999.14,2524.24 cw(c3033.28,2490.1) 3033.28,2538.39 cw(c3033.28,2586.67) v1@2999.14,2552.53 ; R12.1@3380.28,2570.59 ccw(c3357.56,2547.87) 3357.56,2580 ccw(c3357.56,2612.13) R12.1@3380.28,2589.41
  Bottom Layer w10: v2@1997.4,2047.4 cw(c1979.05,2029.05) 2005,2029.05 cw(c2030.95,2029.05) v2@2012.6,2047.4 ; v2(2005,2055) 2005,930 v2(2845,930) ; v2@2837.4,922.4 ccw(c2819.05,904.05) 2819.05,930 ccw(c2819.05,955.95) v2@2837.4,937.6 ; v1@2970.86,2524.24 cw(c2936.72,2490.1) 2985,2490.1 cw(c3033.28,2490.1) v1@2999.14,2524.24 ; v2@2972.4,2062.6 ccw(c2941.98,2093.02) 2985,2093.02 ; v2@2980,2045 2985,2050 v1(2985,2538.39)
U3TX: R36.1 U4.21 U5.18 | length 4870.3
  Top Layer w10: v2(1975,2020) v2(3020,2020) ; v2@1982.6,2012.4 cw(c2000.95,1994.05) 2000.95,2020 cw(c2000.95,2045.95) v2@1982.6,2027.6 ; v2@2809.21,895 U4.21@2809.21,1100.55 ; 2809.21,922.85 ccw(c2847.85,922.85) v2@2820.53,895.53 ; 2809.21,946.99 ccw(c2871.99,946.99) v2@2827.6,902.6 ; U5.18@2912.2,2563.98 2953.98,2563.98 2975,2585 v1(3035,2585) 3220,2585 3295,2660 R36.1@3389.69,2660 ; v2@3012.4,2012.4 ccw(c2994.05,1994.05) 2994.05,2020 ccw(c2994.05,2045.95) v2@3012.4,2027.6 ; v1@3020.86,2570.86 ccw(c2986.72,2536.72) 2986.72,2585 ccw(c2986.72,2633.28) v1@3020.86,2599.14 ; v1@3049.14,2570.86 cw(c3083.28,2536.72) 3083.28,2585 cw(c3083.28,2633.28) v1@3049.14,2599.14 ; R36.1@3380.28,2650.59 ccw(c3357.56,2627.87) 3357.56,2660 ccw(c3357.56,2692.13) R36.1@3380.28,2669.41
  Bottom Layer w10: v2@1967.4,2012.4 cw(c1949.05,1994.05) 1975,1994.05 cw(c2000.95,1994.05) v2@1982.6,2012.4 ; v2(1975,2020) 1975,910 1990,895 v2(2820,895) ; v2@2812.4,887.4 ccw(c2794.05,869.05) 2794.05,895 ccw(c2794.05,920.95) v2@2812.4,902.6 ; 3015,2058.02 ccw(c3058.02,2058.02) v2@3027.6,2027.6 ; v2(3020,2020) 3010,2020 3015,2025 3015,2500 3035,2520 v1(3035,2585) v1@3034,2584 ; v1@3020.86,2570.86 cw(c2986.72,2536.72) 3035,2536.72 cw(c3083.28,2536.72) v1@3049.14,2570.86
V3.3: C17.2 C18.2 P1.8 pad.1@2200,1885 pad.4@1070,2795 pad.5@3565,3160 pad.6@3175,3375 pad.13 R11.2 R12.2 R13.1 R14.1 R17.2 R18.2 R20.1 R21.1 R22.1 R23.1 R30.2 R36.2 VR1.2 | length 9393.7
  Top Layer w20: R11.2@2023.81,1486.86 ccw(c2009.63,1501.04) 2029.68,1501.04 ccw(c2049.74,1501.04) R11.2@2035.56,1486.86 ; R11.2@2029.68,1480 2029.68,1534.68 v2(2045,1550) ; R11.2@2029.68,1499.15 cw(c2095.85,1499.15) v2@2049.06,1545.94
  Top Layer w30: R30.2@1700,3390.32 1769.68,3390.32 1830.32,3329.69 C18.2@1880,3329.69 C17.2@1980,3329.69 2244.68,3329.69 ; R20.1@2841.34,3280 2841.34,3366.34 ; R18.2@3447.98,2496.68 cw(c3430.26,2478.96) 3455.32,2478.96 ; R18.2@3450.32,2500 R12.2@3450.32,2580 R36.2@3450.32,2660 ; R21.1@3450.31,3000 R23.1@3450.31,3080 R22.1@3450.31,3160 pad.5@3565,3160 ; R18.2@3455.32,2490 R17.2@3455.32,2405 3565,2405 ; pad.5@3554.39,3149.39 ccw(c3528.79,3123.79) 3528.79,3160 ccw(c3528.79,3196.21) pad.5@3554.39,3170.61
  Top Layer w50: pad.13@75,1865 85,1855 210,1855 210,1725 235,1700 P1.8@340,1700 ; 210,1865 210,2505 970,2505 1075,2610 1075,2765 1165,2855 v1(1870,2855) ; pad.4@1070,2800 ccw(c1070,2896.57) 1138.28,2828.28 ; v2@2128.46,1891.54 cw(c2197.16,1822.84) 2197.16,1920 ; v2@2128.46,1953.46 ccw(c2209.23,2034.23) 2209.23,1920 ; 2168.18,1916.82 cw(c2175.86,1909.14) 2175.86,1920 ; v2@2193.46,1953.46 ccw(c2274.23,2034.23) 2274.23,1920 ; pad.1@2195.54,1882.75 ccw(c2135,1852.19) 2135,1920 ; pad.1@2203.54,1881.46 cw(c2296.57,1788.43) R13.1@2296.57,1920 ; v2@2207.15,1954.13 cw(c2135,2013.32) 2135,1920 ; VR1.2@2247.05,3034.83 ccw(c2215.8,3066.09) 2260,3066.09 ccw(c2304.2,3066.09) VR1.2@2272.95,3034.83 ; VR1.2@2260,3021.89 VR1.2@2260,3258.11 2260,3345 2290,3375 pad.6@3175,3375 3530,3375 3565,3340 pad.5@3565,3160 3565,2405 ; R13.1@2301.34,1920 2135,1920
  Bottom Layer w20: v2(2045,1550) 2045,1865
  Bottom Layer w50: v1(1870,2855) v1(2135,2855) v2(2135,1960) 2135,1935
  other v1: 2220,2850 2135,2930 2220,2935 2140,3015 2260,3380
  other v2: 2070,1885 2135,1885 2070,1960 2200,1960
V5: C1.2 C15.1 D4.2 J2.3 P1.7 P9.5 P9.6 pad.1@1025,3428.9 pad.2@1395,3430 pad.3@3785,2345 pad.5@1905,2695 pad.8 pad.10 pad.16 pad.17 R1.1 R2.1 R3.2 R4.2 R10.2 R26.2 R29.2 R32.1 R33.2 R34.2 R35.2 | length 13266.2
  Top Layer w20: P1.7@440,1680.47 cw(c440,1633.33) 473.34,1666.66 cw(c506.67,1700) P1.7@459.53,1700 ; P1.7@440,1700 580.32,1559.68 C1.2@760,1559.68 ; C1.2@753.14,1553.81 ccw(c738.96,1539.63) 738.96,1559.68 ccw(c738.96,1579.74) C1.2@753.14,1565.56
  Top Layer w30: R3.2@265,620.32 v1@325.32,620.32 ; R4.2@265,1050.32 v1@325.32,1050.32 ; 294.55,620.32 ccw(c294.55,660.45) v1@322.93,632.07 ; 294.55,1050.32 ccw(c294.55,1090.45) v1@322.93,1062.07 ; v1(355,1155) R2.1@491.34,1155 ; 466.78,1155 ccw(c466.78,1189.56) R2.1@491.22,1165.12 ; 598.66,281.34 R1.1@598.66,380 ; C15.1@748.98,3405.82 cw(c804.7,3350.11) 804.7,3428.9 ; C15.1@769.84,3428.9 D4.2@900,3428.9 pad.1@1025,3428.9 1101.42,3428.9 R29.2@1140,3390.32 1184.68,3435 pad.2@1390,3435 ; C15.1@770.2,3384.61 cw(c877.12,3277.68) D4.2@877.12,3428.9 ; R34.2@830.32,2400 880.32,2450 1320,2450 1365,2495 1365,2575 ; pad.1@1014.39,3418.29 ccw(c988.79,3392.68) 988.79,3428.9 ccw(c988.79,3465.11) pad.1@1014.39,3439.5 ; pad.1@1035.61,3418.29 cw(c1061.21,3392.68) 1061.21,3428.9 cw(c1061.21,3465.11) pad.1@1035.61,3439.5 ; R35.2@1110.32,2400 1110.32,2445.32 ; R10.2@1218.66,1780 v1(1360,1780) ; 1346.72,3435 cw(c1346.72,3381.72) pad.2@1384.39,3419.39 ; 1365,2490.6 cw(c1493.6,2490.6) pad.17@1405.3,2584.09 ; 1365,2560.2 cw(c1427.87,2560.2) pad.17@1384.7,2605.91 ; R26.2@3500,2118.66 3784.96,2118.66 J2.3@3800,2133.7 ; 3711.93,2118.66 ccw(c3711.93,2211.77) J2.3@3777.77,2145.93
  Top Layer w50: v1(355,280) 960,280 1038.66,358.66 R33.2@1140,358.66 pad.16@1300,358.66 ; P9.5@1630,2600 1630,2570 1835,2365 2240,2365 2376,2229 2665.27,2229 2666.27,2230 3785,2230 ; P9.6@1635,2705 1910,2705 2000,2795 R32.1@2000,3021.34 ; P9.6@1638.77,2691.23 cw(c1672.01,2657.99) 1672.01,2705 ; P9.5@1642.4,2600 ccw(c1744.77,2600) 1672.38,2527.62 ; 1868.79,2705 cw(c1868.79,2658.79) pad.5@1901.46,2691.46 ; J2.3@3784.84,2138.86 ccw(c3748.24,2175.46) 3800,2175.46 ; pad.3@3785,2345 3785,2230 ; J2.3@3800,2133.7 3800,2215 3785,2230
  Bottom Layer w20: 210,1630 230,1630 250,1650 390,1650 P1.7@440,1700 ; P1.7@420.47,1700 cw(c373.33,1700) 406.66,1666.66 cw(c440,1633.33) P1.7@440,1680.47
  Bottom Layer w30: pad.2@1384.39,3419.39 cw(c1358.79,3393.79) 1395,3393.79 cw(c1431.21,3393.79) pad.2@1405.61,3419.39 ; v1(1395,2700) pad.2@1395,3420
  Bottom Layer w50: pad.10@75,1965 210,1830 210,1630 210,1335 355,1190 v1(355,1155) ; 330.25,1214.75 cw(c270.5,1155) v1(355,1155) ; v1(355,280) v1(355,1155) ; 355,564.64 ccw(c269.64,564.64) v1(330,625) ccw(c269.64,685.36) 355,685.36 ; 355,994.64 ccw(c269.64,994.64) v1(330,1055) ccw(c269.64,1115.36) 355,1115.36 ; 1385,435 pad.17@1385,2595 ; 1385,463.02 ccw(c1448.02,463.02) v2@1403.46,418.46 ; 1385,1719.64 ccw(c1299.64,1719.64) v1(1360,1780) ccw(c1299.64,1840.36) 1385,1840.36 ; 1385,2558.79 cw(c1431.21,2558.79) pad.17@1398.54,2591.46
  other v2: 1390,355 1345,425 1410,425 1285,430
V12: C16.2 D5.2 J3.2 P1.19 P1.20 pad.0@397.66,3412.34 pad.12 R27.1 R28.2 | length 2371.6
  Top Layer w30: 325,2740 290,2775 290,3139.68 397.66,3247.34 ; pad.0@387.05,3401.74 cw(c361.44,3376.13) 397.66,3376.13 cw(c433.87,3376.13) pad.0@408.26,3401.74 ; pad.0@397.66,3412.34 397.66,3247.34 ; J3.2@400,2735 J3.2@415,2735 ; R28.2@500,3349.68 397.66,3247.34
  Top Layer w50: pad.12@75,2075 145,2075 145,2625 260,2740 325,2740 J3.2@400,2740 700,2740 D5.2@700,2837.32 ; R27.1@581.34,2620 C16.2@581.34,2723.62
V_BAT: U4.1
VBAT: C19.2 pad.2@3250,3240 U6.8 U8.2 | length 666.3
  Top Layer w20: U6.8@3162.36,3155 3245,3155 3330,3240
  Top Layer w50: pad.2@3250,3240 3330,3240 C19.2@3389.69,3240
  Bottom Layer w50: pad.2@3250,3240 3250,2997.4 U8.2@3307.4,2940
VCC_030: P7.4 R14.2 U5.5 U5.16 | length 1606
  Top Layer w20: U5.5@2687.8,2512.8 2688.2,2513.2 U5.16@2912.2,2513.2 ; U5.5@2703.24,2513.2 ccw(c2703.24,2606.76) v1@2769.39,2540.61 ; 2751.52,2513.2 ccw(c2751.52,2558.48) v1@2783.54,2526.46 ; v1@2776.46,2526.46 ccw(c2808.48,2558.48) 2808.48,2513.2 ; v1@2790.61,2540.61 ccw(c2856.76,2606.76) 2856.76,2513.2
  Top Layer w30: R14.2@2418.66,2860 2915,2860 2960,2815 ; 2910.45,2864.55 cw(c2825.9,2780) P7.4@2945.47,2780 ; P7.4@2949.74,2790.29 ccw(c2925.11,2815) 2960,2815 ; P7.4@2960,2780 2960,2815 ; 2961.66,2813.34 cw(c2928.33,2780) P7.4@2975.47,2780 ; P7.4@2970.26,2790.29 cw(c2994.89,2815) 2960,2815
  Bottom Layer w30: v1@2810,2570 2810,2630 ; v1@2835.41,2583.41 cw(c2865.41,2630) 2810,2630 ; P7.4@2945.47,2780 cw(c2910.4,2780) 2935.2,2755.2 cw(c2960,2730.4) P7.4@2960,2765.47 ; P7.4@2960,2780 2810,2630
  other v1: 2780,2530 2830,2575
VCC_103: C8.2 C9.1 C12.2 C20.2 P5.4 pad.0@3005,1400 R13.2 R24.2 U4.9 U4.24 U4.36 U4.48 | length 3332.6
  Top Layer w10: U4.9@2600.55,1210.79 2664.21,1210.79 v1(2685,1190) ; 2649.23,1340.77 cw(c2611.06,1302.59) v1@2665.01,1300.7 ; U4.48@2651.73,1419.45 2651.73,1338.27 v1@2687.5,1302.5 ; 2659.39,1330.61 ccw(c2685,1356.21) v1@2685,1320 ; 2665.49,1324.51 cw(c2642.48,1301.49) v1@2675.01,1300.35 ; v1@2795.86,1344.96 ccw(c2798.25,1372.89) 2818.07,1353.07 ; v1@2796.71,1354.93 ccw(c2800.65,1400.88) 2833.27,1368.27 ; v1@2797.5,1332.5 2833.27,1368.27 ; v1@2815,1335 cw(c2851.21,1335) 2825.61,1360.61 ; v1@2835,1190 cw(c2835,1177.93) 2843.54,1186.46 ; v1@2835,1195 2868.27,1161.73 U4.24@2868.27,1100.55 ; v1@2844.33,1206.4 ccw(c2867.33,1197.53) 2849.9,1180.1 ; v1@2853.66,1202.8 ccw(c2883.01,1191.48) 2860.77,1169.23 ; U4.36@2919.45,1368.27 2833.27,1368.27
  Top Layer w30: v2(3125.31,1410.32) C8.2@3200,1410.32 ; C8.2@3199.69,1410 C8.2@3200,1410.32 ; C9.1@3300,1410.32 C8.2@3200,1410.32
  Top Layer w50: R13.2@2418.66,1920 2910,1920 2960,1870 P5.4@2960,1820 2960,1445 pad.0@3005,1400 ; 2916.92,1913.08 cw(c2823.83,1820) P5.4@2955.47,1820 ; 2960,1432.45 cw(c3053.7,1432.45) R24.2@2999.75,1509.06 ; 2960,1468.88 ccw(c2988.88,1468.88) v2@2968.46,1448.46 ; 2960,1626.34 ccw(c3094.49,1626.34) R24.2@2999.39,1531.24 ; v2@2965.75,1455 ccw(c3003.77,1455) 2976.88,1428.12
  Bottom Layer w30: pad.0@3015.31,1410.32 C20.2@3230,1410.32 ; pad.0@3015.61,1389.39 cw(c3066.12,1338.88) 3066.12,1410.32 ; 3161.19,1410.32 cw(c3161.19,1353.04) C20.2@3201.69,1393.54
  Bottom Layer w50: v1(2685,1190) v1(2685,1300) ; v1@2685,1303.84 2716.16,1335 v1(2795,1335) ; 2707.16,1164 2807.84,1164 2826.75,1182.91 ; 2821.68,1177.84 ccw(c2789.51,1210) v1(2835,1210) ; 2863.28,1363.28 cw(c2795,1431.57) v1(2795,1335) ; C12.2@2899.58,1399.58 cw(c2935,1364.16) C12.2@2935,1414.25 ; C12.2@2900,1400 cw(c2934.42,1365.59) C12.2@2935.14,1414.25 ; C12.2@2915,1415 2835,1335 v1(2795,1335)
  other v2: 2935,1405 2915,1455 2975,1455
VCC_1302: R20.2 U6.1 | length 124
  Top Layer w30: U6.1@2957.64,3155 R20.2@2957.64,3278.98
VCC_R: P10.2 P10.4 R33.1 | length 378.7
  Top Layer w50: R33.1@1141.34,240 P10.2@1520,240
pads on no net: P10.1 P10.7 P10.11 P10.12 P10.13 P10.15 P10.16 P10.17 P10.18 P10.27 P10.28 P10.29 P10.31 P10.32 P10.33 P10.34 P10.35 P10.36 P10.37 P10.38 P10.40 U4.3 U4.4 U4.25 U4.26 U4.27 U4.29 U4.32 U4.33 U4.38 U5.6 U5.7 U5.8 U5.14

## Polygon pours and split planes (outlines as drawn)
GND on Bottom Layer "Top Layer-No Net" (hatched 90Degree grid 15 track 10): 0,0 3937.01,0 3937.01,3543.31 0,3543.31

## Keep-outs
Keep-Out Layer:
  the board outline again, w9.84

## Other copper
Top Layer:
  rectangle net GND: 2720,1200 2795,1295
  rectangle net VCC_030: 2750,2513.2 2855,2595
  rectangle net GND: 2745,2390 2860,2495
  rectangle net V3.3: 2085,2815 2330,3065
  rectangle net GND: 2335,3185 2580,3330
  rectangle net V5: 1350,2545 1675,2750
  rectangle net VCC_R: 1480,205 1560,375
  rectangle net GND: 350,2800 525,2980
  rectangle net GND: 305,1360 585,1440
  rectangle net GND: 835,2950 1805,3185
  rectangle net GND: 1590,2970 1790,3180
  rectangle net GND: 3610,1075 3880,1235
  rectangle net VCC_103: 2885,1385 3035,1525
  rectangle net V3.3: 2035,1850 2235,1990
  rectangle net V5: 1250,310 1445,455
Bottom Layer:
  rectangle net V12: 310,2275 475,2780
  rectangle net VCC_030: 2750,2510 2855,2600
  rectangle net GND: 2635,2390 2860,2495
  rectangle net GND: 2410,2900 2580,3510
  rectangle net V5: 1250,310 1445,460
  rectangle net VCC_R: 1480,205 1560,375
  rectangle net GND: 350,2795 615,2975
  rectangle net GND: 305,1360 470,1440
  rectangle net GND: 305,1965 585,2035
  rectangle net GND: 835,2960 975,3185
  rectangle net GND: 1590,2960 1805,3175
  rectangle net GND: 2720,1195 2795,1295
  rectangle net GND: 3605,1070 3900,1290
  rectangle net VCC_103: 2885,1380 3040,1475
  rectangle net V3.3: 2035,1850 2235,1990
  rectangle net V3.3: 2085,2810 2255,3060

## Silkscreen, mask and mechanical layers (free items; w line width, h text height)
Top Overlay:
  text "12V" at 520,3465 h60
  text "3.3V" at 1500,3460 h60
  text "5V" at 1210,3455 h60
  text "G C D V" at 2630,2850 h54
  text "G C D V" at 2645,1905 h54
  text "XDM-I Room V0.3 20180711" at 1735,130 h60
Bottom Overlay:
  text "GND" at 270,3010 h60
  text "12V" at 265,2705 h60

## Text inside footprints (layer, text, board x,y; h text height)
P1: Top Overlay "2" at 360,1300 h36 r90; Top Overlay "1" at 460,1300 h36 r90; Top Overlay "19" at 455,2380 h36 r90; Top Overlay "20" at 360,2380 h36 r90
P3: Top Overlay "2" at 2440,480 h36; Top Overlay "1" at 2450,380 h36; Top Overlay "9" at 3015,380 h36; Top Overlay "10" at 3015,480 h36
P10: Top Overlay "39" at 1640,2220 h36 r90; Top Overlay "40" at 1540,2220 h36 r90; Top Overlay "2" at 1540,140 h36 r90; Top Overlay "1" at 1640,145 h36 r90